# Altium PCB nrf52832_qfax_dcdc.PcbDoc
Units mm, origin at the board's own origin, x right, y up, seen from the top; angles counter-clockwise.
Board outline 43.26 x 33.96 mm, 2 copper layers (Top Layer, Bottom Layer), stack 1.671 mm thick; 36 components, 52 nets, 169 pads, 196 vias.
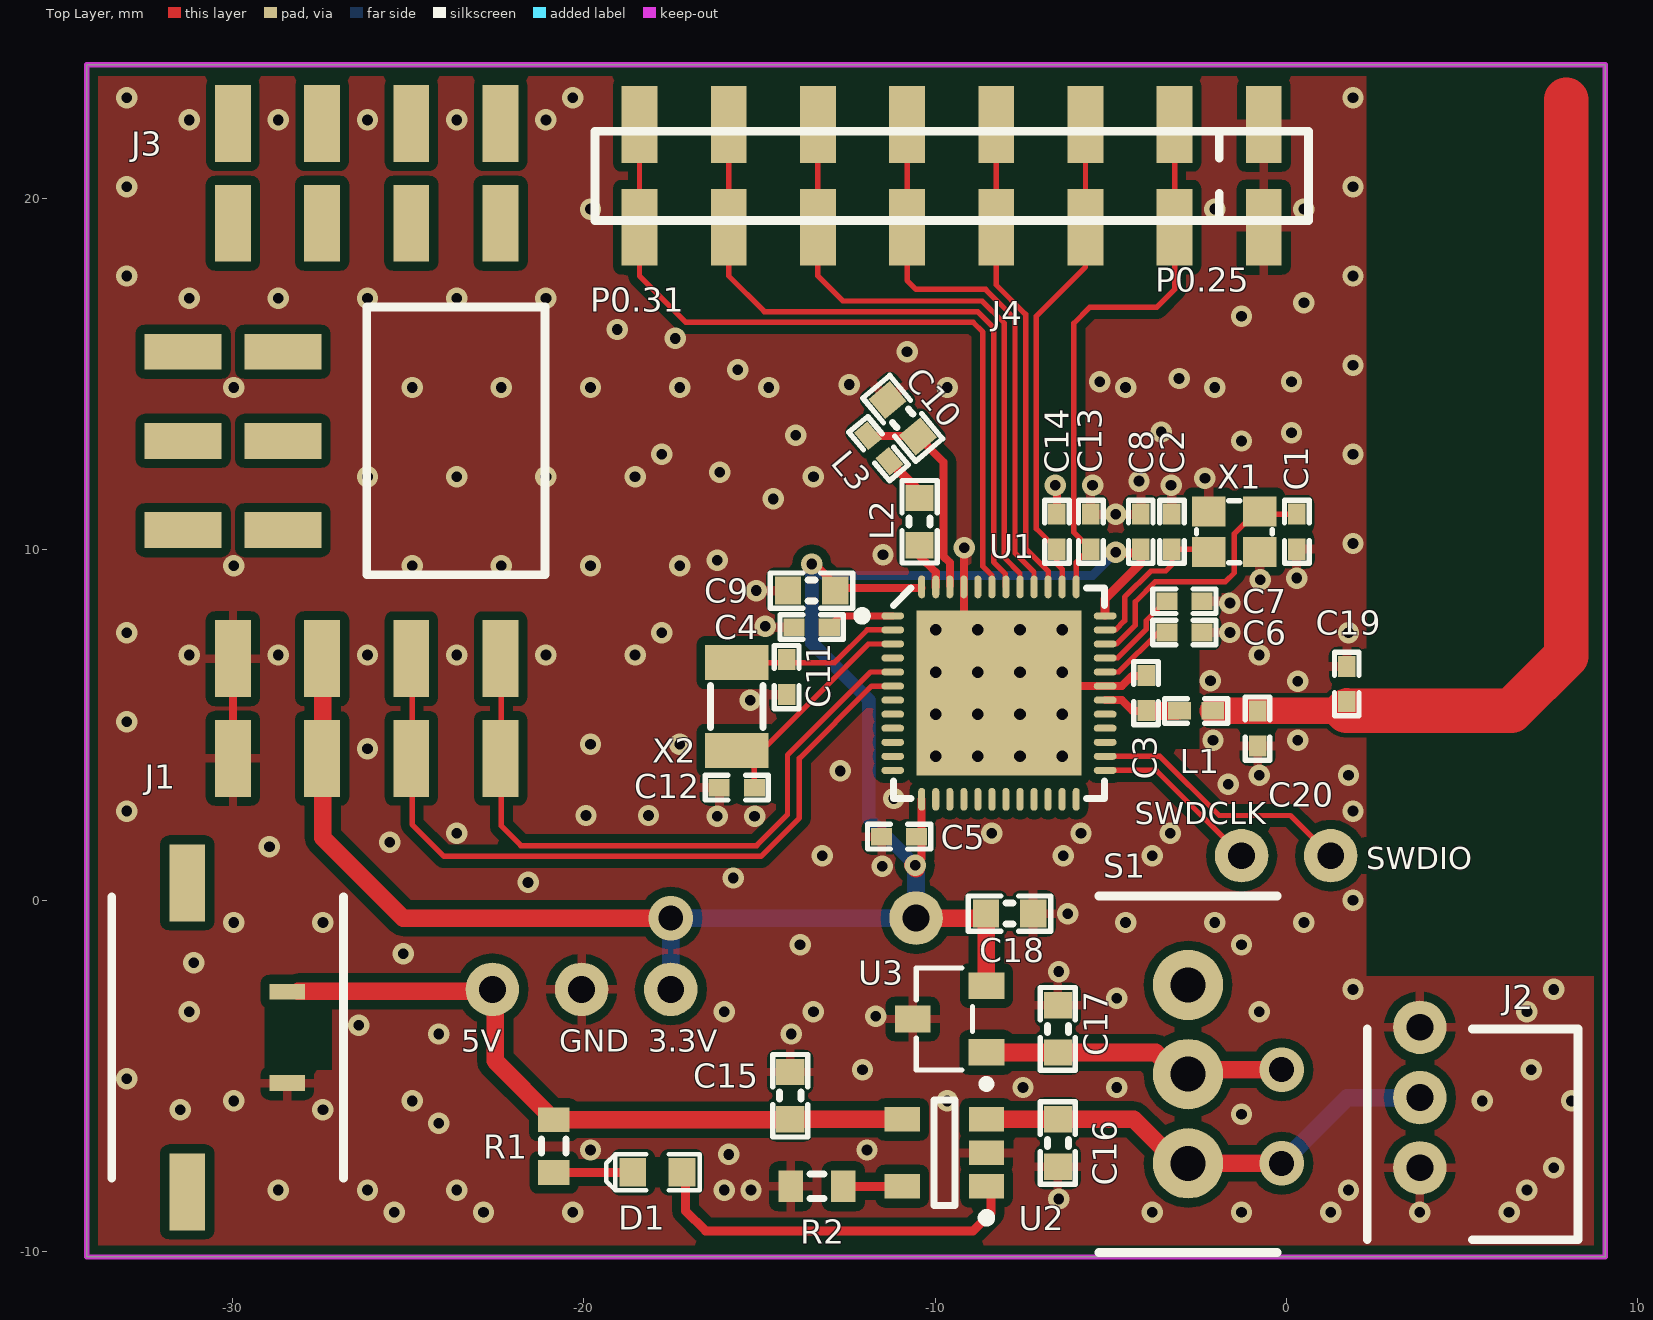
[diagram p0: Top Layer view]
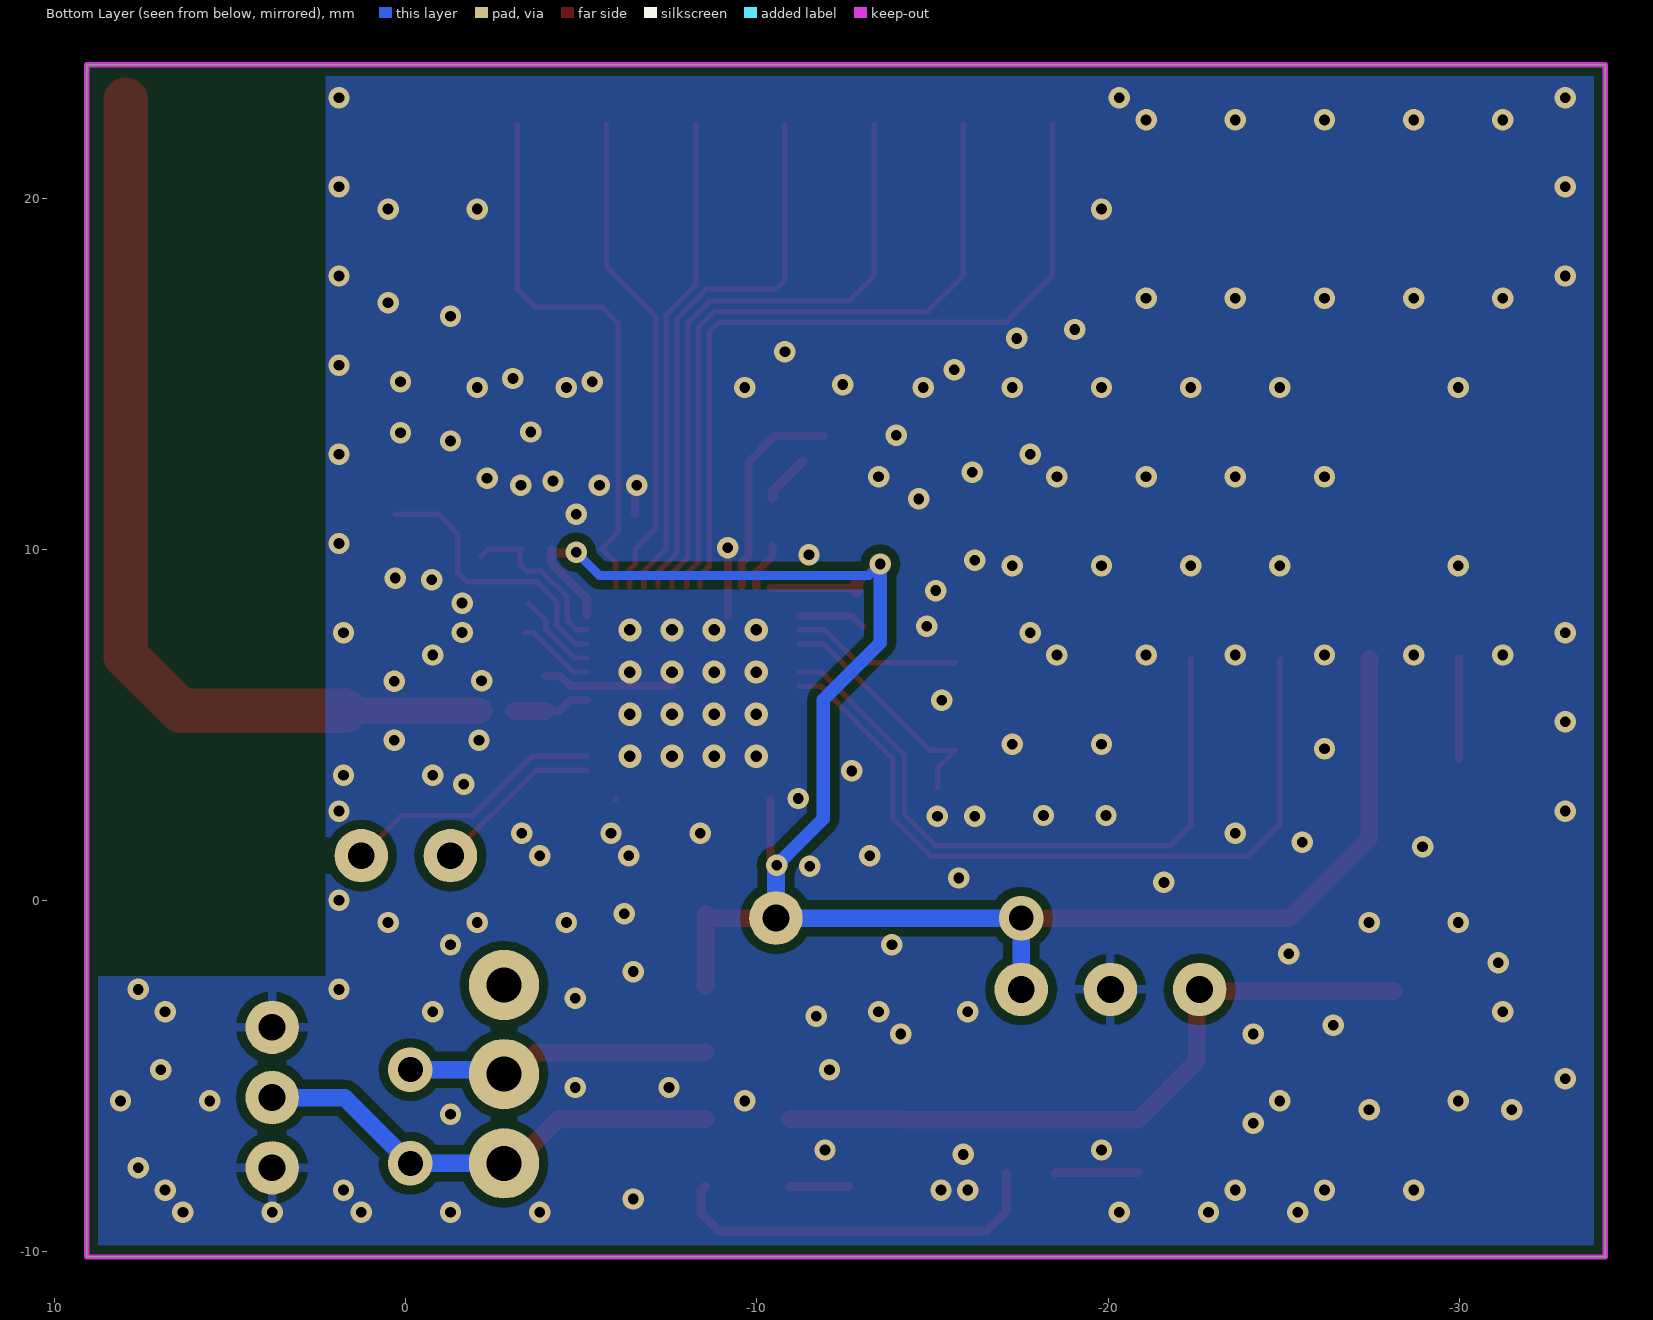
[diagram p1: Bottom Layer view, seen from below]
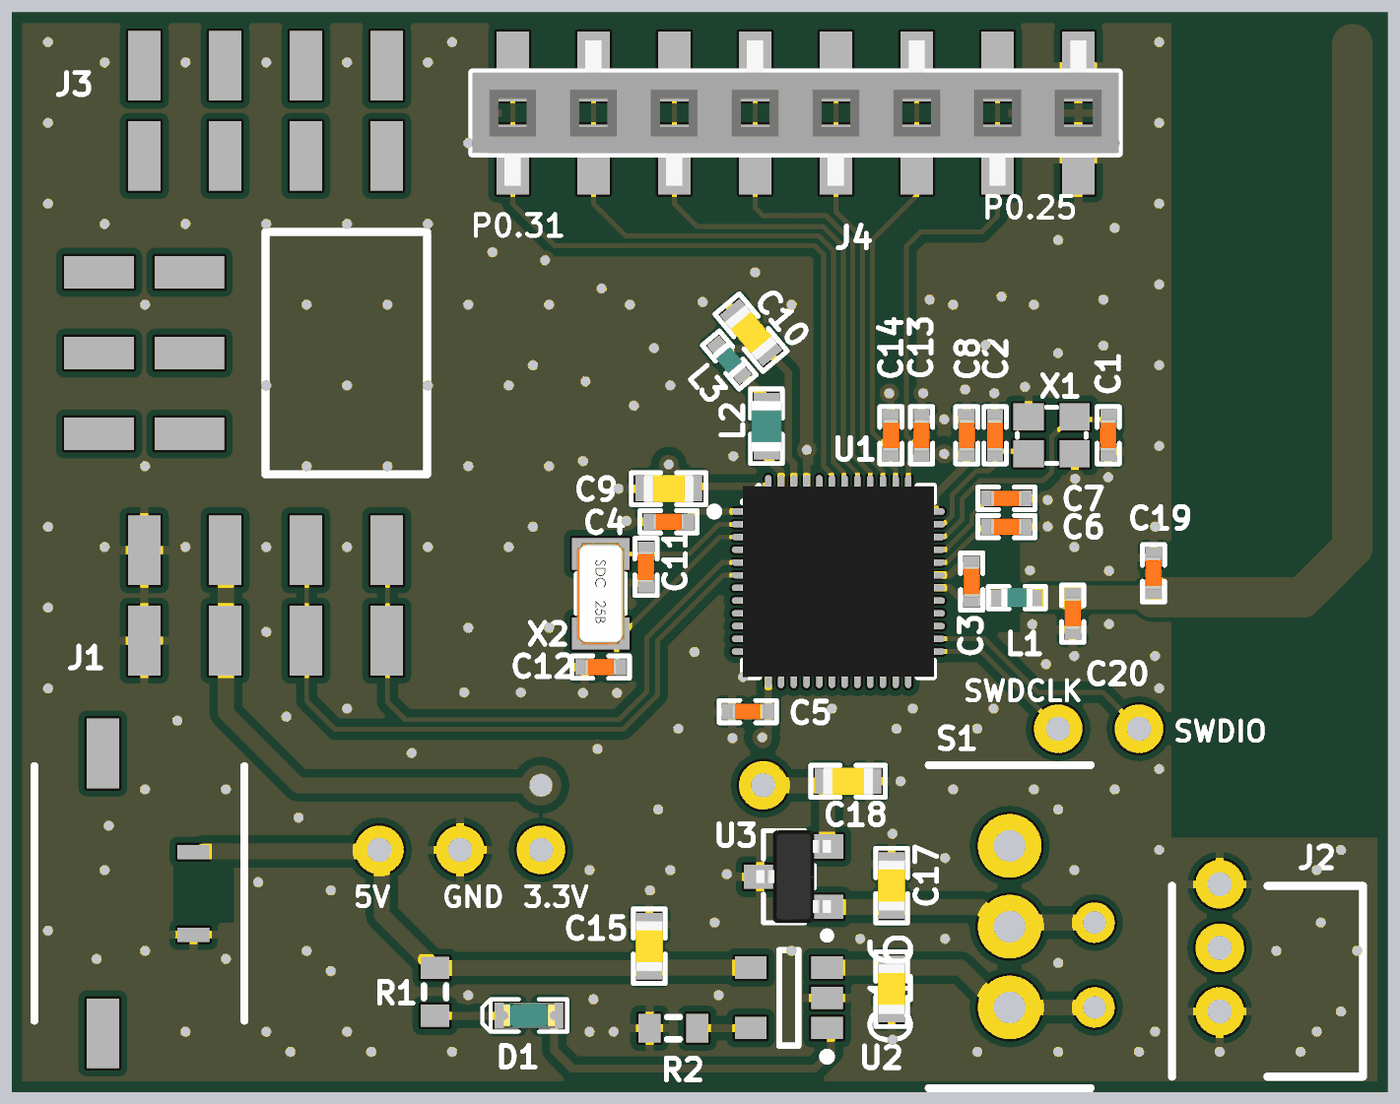
[diagram p2: 3D render of the assembled board from above, using the file's embedded part models]

## Layer stack, top to bottom
Top Solder: solder mask 0.0102, Solder Resist, Dk 3.5
Top Layer: signal copper 0.0356
Dielectric1: core 1.6002, FR-4, Dk 4.8
Bottom Layer: signal copper 0.0356
Bottom Solder: solder mask 0.0102, Solder Resist, Dk 3.5

## Board outline
-34.163,-10.16 -34.163,23.8 9.093,23.8 9.093,-10.16

## Design rules (kind name [scope] priority, off if disabled: settings)
Clearance Polygon_ANT [(InNamedPolygon('Top_Layer-GND')) or (InNamedPolygon('Bottom_Layer-GND')) vs InNet('RF')] p1: gap=0.127 ignorepadtopadclearanceinfootprint=FALSE except(0: Arc-Hole Track-Hole SMDPad-Hole THPad-Hole Via-Hole Fill-Hole Poly-Hole Region-Hole Text-Hole)
Clearance Polygon [(InNamedPolygon('Top_Layer-GND')) or (InNamedPolygon('Bottom_Layer-GND'))] p2: gap=0.254 ignorepadtopadclearanceinfootprint=FALSE except(0: Arc-Hole Track-Hole SMDPad-Hole THPad-Hole Via-Hole Fill-Hole Poly-Hole Region-Hole Text-Hole)
Clearance [All] p3: gap=0.152 ignorepadtopadclearanceinfootprint=FALSE except(0: Arc-Hole Track-Hole SMDPad-Hole THPad-Hole Via-Hole Fill-Hole Poly-Hole Region-Hole Text-Hole)
ComponentClearance [All] p1 off: gap=0.254 collisioncheckmode=3 verticalgap=0.254 showdistances=FALSE
FabricationTestPointUsage TestPointUsage [All] p1: valid=0 allowmultiple=FALSE
FabricationTestpoint Testpoint [All] p1: side=3 testpointundercomponent=TRUE minsize=1.016 maxsize=2.54 preferedsize=1.524 minholesize=0 maxholesize=1.016 preferedholesize=0.813 testpointgrid=0.025 allowsidetop=TRUE allowsidebottom=TRUE usegrid=TRUE gridtolerance=0
Height [All] p1 off: minheight=0 maxheight=25.4 prefheight=12.7
HoleSize [All] p1: absolutevalues=TRUE maxlimit=4.064 minlimit=0.305 maxpercent=80.000 minpercent=20.000
MinimumAnnularRing [All] p1 off: minimumring=0.152
PolygonConnect PolygonConnect_1 [isVia and innet(gnd)] p1: connectstyle=Direct reliefconductorwidth=0.254 reliefentries=4 polygonreliefangle="90 Angle" airgapwidth=0.254
PolygonConnect [All] p2: connectstyle=Relief reliefconductorwidth=0.254 reliefentries=4 polygonreliefangle="90 Angle" airgapwidth=0.254
RoutingVias [All] p1: holewidth=0.406 width=0.813 viastyle="Through Hole" minholewidth=0.254 minwidth=0.254 maxholewidth=0.711 maxwidth=1.27
SilkToSolderMaskClearance SilkscreenOverComponentPads [IsPad] p1: minsilkscreentomaskgap=0.254 clearancetoexposedcopper=TRUE
SolderMaskExpansion [All] p1: expansion=0.076
Width [All] p1: maxlimit=2.54 minlimit=0.15 preferedwidth=0.152
24 further rules are at their usual default settings.

## Classes and differential pairs
component class Header: C19 C20 J4
component class nrf52832_qfab_dcdc: C1 C2 C3 C4 C5 C6 C7 C8 C9 C10 C11 C12 C13 C14 L1 L2 L3 U1 X1 X2
component class Power_management: C15 C16 C17 C18 D1 J1 J2 J3 J? R1 R2 S1 U2 U3

## Components (designator, comment, footprint, x,y, rotation, side; value= is the part's Value field where it differs from the comment)
C1 "12pF" CAPC1005X04L 0.305,10.497 r270 top
C2 "12pF" CAPC1005X04L -3.251,10.497 r90 top
C3 "0.8pF" CAPC1005X04L -3.988,5.899 r270 top
C4 "100nF" CAPC1005X04L -13.513,7.779 r180 top
C5 "100nF" CAPC1005X04L -11.024,1.81 r180 top
C6 "N.C." CAPC1005X04L -2.896,7.626 r180 top
C7 "100pF" CAPC1005X04L -2.896,8.515 r0 top
C8 "100nF" CAPC1005X04L -4.14,10.497 r90 top
C9 "4.7µF" CAPC1608X06L -13.513,8.82 r180 top
C10 "1.0µF" CAPC1608X06L -10.921,13.728 r310 top
C11 "12pF" CAPC1005X04L -14.224,6.356 r270 top
C12 "12pF" CAPC1005X04L -15.646,3.207 r180 top
C13 "12pF" CAPC1005X04L -5.563,10.497 r90 top
C14 "12pF" CAPC1005X04L -6.528,10.497 r90 top
C15 "4.7µF" CAPC1608X06L -14.122,-5.567 r270 top
C16 "4.7µF" CAPC1608X06L -6.502,-6.917 r90 top
C17 "1µF" CAPC1608X06L -6.502,-3.662 r270 top
C18 "1µF" CAPC1608X06L -7.874,-0.381 r180 top
C19 "1.2pF" CAPC1005X04L 1.727,6.16 r90 top
C20 "12pF" CAPC1005X04L -0.813,4.89 r270 top
D1 "LED2" LED_0603_G -17.907,-7.747 r0 top
J1 "Micro_USB_B" Micro_USB_AB -28.448,-2.607 r270 top
J2 "Bat_con" Bat_con 3.81,-5.62 r270 top
J3 "Accel_shield_MPU9250" Accel_shield -29.995,10.541 r90 top
J4 "8pin_header" SOCKET_1x8_SMD -0.635,20.633 r180 top
L1 "3.9nH" INDC1005X04L -2.565,5.391 r0 top
L2 "10µH" INDC1608X06L -10.439,10.781 r270 top
L3 "15nH" INDC1005X04L -11.607,12.864 r310 top
R1 "Res3" J1-0603 -20.853,-7.004 r90 top value=330
R2 "Res3" J1-0603 -13.36,-8.147 r0 top value=10K
S1 "Switch" Switch -2.794,-7.493 r0 top
U1 "nRF52832-QFAB" QFN40P600X600X90-48N -8.179,5.899 r0 top locked
U2 "MCP73831" SOT23-5 -9.734,-7.192 r180 top
U3 "3.3V Regulator AP7333" SOT-23A -8.534,-4.332 r90 top value=AP7333-33SAG-7
X1 "32MHz" BT-XTAL_2016 -1.473,10.497 r180 top
X2 "32.768kHz" XTAL_3215 -15.646,5.518 r270 top

## Footprints (in the part's own frame and the unit in brackets; to place one, negate y for a bottom-side part, rotate by r counter-clockwise, add the part's x,y. Pads: shape width x height; smd on the part's side, far side on the other; paste and mask are expansions set on the pad)
Accel_shield [mm]
  rect 2.19x1.02 smd: 1(-6.5,-7.62) 1(-3.66,-7.62) 2(-6.5,-5.08) 2(-3.66,-5.08) 3(-6.5,-2.54) 3(-3.66,-2.54) 4(-6.5,0) 4(-3.66,0) 8(8.74,0) 8(11.58,0) 9(8.74,-2.54) 9(11.58,-2.54) 10(8.74,-5.08) 10(11.58,-5.08) 11(8.74,-7.62) 11(11.58,-7.62)
  rect 1.02x2.19 smd: 5(0,1.42) 5(0,-1.42) 6(2.54,-1.42) 6(2.54,1.42) 7(5.08,-1.42) 7(5.08,1.42)
  silkscreen extent -1.27,-8.89 6.35,-3.81
Bat_con [mil]
  round 60 hole 30: 1(0,0) 2(78.74,0)
  silkscreen extent -77,-59 159,177
BT-XTAL_2016 [mm] "Crystal 2.0 x 1.6 mm"
  rect 0.95x0.85 smd: 1(-0.725,-0.575) 2(0.725,-0.575) 3(0.725,0.575) 4(-0.725,0.575)
  silkscreen extent -1.08,-0.88 1.08,0.88
CAPC1005X04L [mm] "Chip Capacitor, 2-Leads, Body 1.0x0.5mm, IPC High Density"
  rect 0.6x0.5 smd: 1(-0.5,0) 2(0.5,0)
  silkscreen extent -0.9,-0.35 0.9,0.35, body extent -0.51,-0.25 0.51,0.25, height 0.5
CAPC1608X06L [mm] "Chip Capacitor, 2-Leads, Body 1.6x0.8mm, IPC High Density"
  rect 0.75x0.8 smd: 1(-0.675,0) 2(0.675,0)
  silkscreen extent -1.18,-0.5 1.17,0.5, body extent -0.8,-0.43 0.8,0.43, height 0.8
INDC1005X04L [mm] "Chip Inductor, 2-Leads, Body 1.0x0.5mm, IPC High Density"
  rect 0.65x0.5 smd: 1(-0.475,0) 2(0.475,0)
  silkscreen extent -0.9,-0.35 0.9,0.35, body extent -0.5,-0.3 0.5,0.3, height 0.5
INDC1608X06L [mm] "Chip Inductor, 2-Leads, Body 1.6x0.8mm, IPC High Density"
  rect 0.75x0.8 smd: 1(-0.675,0) 2(0.675,0)
  silkscreen extent -1.18,-0.5 1.17,0.5, body extent -0.8,-0.48 0.8,0.48, height 0.8
J1-0603 [mm] "Chip Resistor, Body 1.6x0.8mm, IPC High Density"
  rect 0.7x0.9 smd: 1(-0.75,0) 2(0.75,0)
  silkscreen extent -0.2,-0.35 0.2,0.35, body extent -0.85,-0.48 0.85,0.48, height 0.9
LED_0603_G [mil]
  rect 30x32 smd: 1(-27.5,0) 2(27.5,0)
  silkscreen extent -57,-20 48,20, body extent -32,-16 32,16, height 24
Micro_USB_AB [mm]
  rect 2.19x1.02 smd: 0(-3.1,-2.85) 0(5.7,-2.85)
  rect 0.45x1 smd: 1(0,0) 5(2.6,0)
  silkscreen extent -2.7,-5 5.3,1.6
QFN40P600X600X90-48N [mm] "QFN, 48-Leads, Body 6,0x6,0mm (max), Pitch 0,40mm, IPC Medium Density"
  oval 0.65x0.2 smd: 1(-3.025,2.2) 2(-3.025,1.8) 3(-3.025,1.4) 4(-3.025,1) 5(-3.025,0.6) 6(-3.025,0.2) 7(-3.025,-0.2) 8(-3.025,-0.6) 9(-3.025,-1) 10(-3.025,-1.4) 11(-3.025,-1.8) 12(-3.025,-2.2) 25(3.025,-2.2) 26(3.025,-1.8) 27(3.025,-1.4) 28(3.025,-1) 29(3.025,-0.6) 30(3.025,-0.2) 31(3.025,0.2) 32(3.025,0.6) 33(3.025,1) 34(3.025,1.4) 35(3.025,1.8) 36(3.025,2.2)
  oval 0.2x0.65 smd: 13(-2.2,-3.025) 14(-1.8,-3.025) 15(-1.4,-3.025) 16(-1,-3.025) 17(-0.6,-3.025) 18(-0.2,-3.025) 19(0.2,-3.025) 20(0.6,-3.025) 21(1,-3.025) 22(1.4,-3.025) 23(1.8,-3.025) 24(2.2,-3.025) 37(2.2,3.025) 38(1.8,3.025) 39(1.4,3.025) 40(1,3.025) 41(0.6,3.025) 42(0.2,3.025) 43(-0.2,3.025) 44(-0.6,3.025) 45(-1,3.025) 46(-1.4,3.025) 47(-1.8,3.025) 48(-2.2,3.025)
  rect 4.7x4.7 smd: 49(0,0)
  silkscreen extent -4.02,-3 3,3, body extent -3.02,-3.02 3.02,3.02, height 0.86
SOCKET_1x8_SMD [mm]
  rect 1.02x2.19 smd: 1(0,1.465) 1(0,-1.465) 2(2.54,-1.465) 2(2.54,1.465) 3(5.08,-1.465) 3(5.08,1.465) 4(7.62,-1.465) 4(7.62,1.465) 5(10.16,-1.465) 5(10.16,1.465) 6(12.7,1.465) 6(12.7,-1.465) 7(15.24,-1.465) 7(15.24,1.465) 8(17.78,-1.465) 8(17.78,1.465)
  silkscreen extent -1.27,-1.27 19.05,1.27, body extent -1.27,-2.29 19.05,2.29, height 7.47
SOT23-5 [mm] "SOT23, 5-Leads, Body 2,90x2,45mm, Pitch 0,95mm, IPC Medium Density"
  rect 1x0.7 smd: 1(-1.2,0.95) 2(-1.2,0) 3(-1.2,-0.95) 4(1.2,-0.95) 5(1.2,0.95)
  silkscreen extent -1.33,-1.5 0.3,1.97, body extent -0.7,-1.5 0.7,1.5, height 1.1
SOT-23A [mil]
  rect 30x40 smd: 1(0,0) 2(74.8,0) 3(37.4,82.68)
  silkscreen extent -39,-4 94,79, body extent -20,-5 95,87, height 39
Switch [mm]
  round 2 hole 1: 1(0,0) 2(0,2.54) 3(0,5.08)
  silkscreen extent -2.54,-2.54 2.54,7.62
XTAL_3215 [mm] "XTAL SMD 3.2 x 1.5 mm"
  rect 1x1.8 smd: 1(-1.25,0) 2(1.25,0)
  silkscreen extent -0.6,-0.75 0.6,0.75, body extent -1.6,-0.75 1.6,0.75, height 0.81

## Part data
C1 C2 C11 C12 C13 C14: library part C0402-12p, "Capacitor, NP0, ±2%", Artikkelnr Noca=20029159, Artikkelnr Simpro=N.A., Footprint Doc=0402, LatestRevisionDate=2011-05-11, Note=50V, Part Number=C0402-12p, Pin Count=2, Published=2009-05-08, Publisher="Nordic Semiconductor"
C3: library part C0402-0.8p, "Capacitor, NP0, ±5%", Artikkelnr Noca=20029147, Artikkelnr Simpro=N.A., Footprint Doc=0402, LatestRevisionDate=2012-11-21, Note=50V, Part Number=C0402-0.8p, Pin Count=2, Published=2009-05-08, Publisher="Nordic Semiconductor"
C4 C5 C8: library part C0402-100n, "Capacitor, X7R, ±10%", Artikkelnr Noca=20039200, Artikkelnr Simpro=N.A., Footprint Doc=0402, LatestRevisionDate=2009-11-23, Note=16V, Part Number=C0402-100n, Pin Count=2, Published=2009-05-08, Publisher="Nordic Semiconductor"
C6: library part C0402-N.C., "Not mounted", Artikkelnr Noca=N.A., Artikkelnr Simpro=N.A., Footprint Doc=0402, LatestRevisionDate=2009-05-08, Note="Chip Cap", Part Number=C0402-N.C., Pin Count=2, Published=2009-05-08, Publisher="Nordic Semiconductor"
C7: library part C0402-100p, "Capacitor, NP0, ±5%", Artikkelnr Noca=20029135, Artikkelnr Simpro=N.A., Footprint Doc=0402, LatestRevisionDate=2009-05-08, Note=50V, Part Number=C0402-100p, Pin Count=2, Published=2009-05-08, Publisher="Nordic Semiconductor"
C9: library part C0603-4µ7, "Capacitor, X5R, ±10%", Artikkelnr Noca=20069060, Artikkelnr Simpro=N.A., Footprint Doc=0603, LatestRevisionDate=2009-11-23, Note=6.3V, Part Number=C0603-4µ7, Pin Count=2, Published=2009-05-08, Publisher="Nordic Semiconductor"
C10: library part C0603-1µ0, "Capacitor, X7R, ±10%", Artikkelnr Noca=20039335, Artikkelnr Simpro=N.A., Footprint Doc=0603, LatestRevisionDate=2013-06-05, Note=16V, Part Number=C0603-1µ0, Pin Count=2, Published=2009-05-08, Publisher="Nordic Semiconductor"
C15 C16 C17 C18: "Capacitor, X5R, ±10%", Part Number=C0603-4µ7, Artikkelnr Noca=20069060, Artikkelnr Simpro=N.A., Footprint Doc=0603, LatestRevisionDate=2009-11-23, Note=6.3V, Pin Count=2, Published=2009-05-08, Publisher="Nordic Semiconductor"
C19 C20: "Capacitor, NP0, ±2%", Part Number=C0402-12p, Artikkelnr Noca=20029159, Artikkelnr Simpro=N.A., Footprint Doc=0402, LatestRevisionDate=2011-05-11, Note=50V, Pin Count=2, Published=2009-05-08, Publisher="Nordic Semiconductor"
D1: "Typical RED, GREEN, YELLOW, AMBER GaAs LED", LatestRevisionDate=17-Jul-2002, LatestRevisionNote="Re-released for DXP Platform.", PackageDescription="SM LED; 2 Flat Leads", PackageReference=3.2X1.6X1.1, PackageVersion=Feb-2002, Published=8-Jun-2000, Publisher="Altium Limited"
J4: Supplier Part Number 1=2698925, Supplier 1=Arrow, Supplier 2=Arrow, Supplier 3=Digi-Key, Supplier Part Number 2=2698940, Supplier Part Number 3=SAM1198-08-ND
L1: library part L0402-3n9, "High frequency chip inductor ±5%", Manufacturer=Murata, Manufacturer Part Number=LQP15MN3N9B02D, Supplier part number=490-1131-1-ND, Artikkelnr Noca=33029151, Artikkelnr Simpro=N.A., Datasheet=http://search.murata.co.jp/Ceramy/image/img/PDF/ENG/L0075S0084LQP15M.pdf, Footprint Doc=0402, LatestRevisionDate=2012-09-19, Note="High frequency chip inductor ±5%", Part Number=L0402-3n9, Pin Count=2, Published=2009-05-08, Publisher="Nordic Semiconductor", Supplier=Digi-Key
L2: library part L0603-10µ, "Chip inductor, IDC,min = 50 mA, ±20%", 2nd source part number=178-6105, Manufacturer="Taiyo Yuden", Manufacturer Part Number=LBMF1608T100K, Supplier part number=587-1714-1-ND, 2nd source Supplier=Farnell, Artikkelnr Noca=33029314, Artikkelnr Simpro=N.A., Datasheet=http://www.yuden.co.jp/ut/product/pdf/elb2_e.pdf, Footprint Doc=0603, LatestRevisionDate=2012-09-19, Note="LBMF1608T100K 10µH 80mA 0603", Part Number=L0603-10µ, Pin Count=2, Published=2010-02-24, Publisher="Nordic Semiconductor", Supplier=Digi-Key
L3: library part L0402-15n, "High frequency chip inductor ±10%", 2nd source part number=658-1328, Manufacturer="Taiyo Yuden", Manufacturer Part Number=HK100515NJ-T, Supplier part number=587-1521-1-ND, 2nd source Supplier=Farnell, Artikkelnr Noca=33029323, Artikkelnr Simpro=N.A., Datasheet=http://www.yuden.co.jp/productdata/catalog/en/mlci04_e.pdf, Footprint Doc=0402, LatestRevisionDate=2012-09-19, Note="High frequency chip inductor ±10%", Part Number=L0402-15n, Pin Count=2, Published=2010-07-12, Publisher="Nordic Semiconductor", Supplier=Digi-Key
R1 R2: "Resistor", LatestRevisionDate=29-May-2009, LatestRevisionNote="IPC-7351 Footprint Added.", PackageDescription="Chip Resistor", PackageReference=J1-0603, Published=8-Jun-2000, Publisher="Altium Limited"
U1: "Multi-protocol Bluetooth Low Energy, ANT and 2.4GHz proprietary system-on-chip", Manufacturer="Nordic Semiconductor", Artikkelnr Noca=N.A., Artikkelnr Simpro=N.A., Footprint Doc=QFN-48, LatestRevisionDate=2016-11-24, Manufacturer Part Number=nRF52832-QFAB, Part Number=nRF52832-QFAB, Pin Count=48, Published=2016-11-24, Publisher="Nordic Semiconductor", Supplier="Nordic Semiconductor"
U3: "300mA, Low Quiescent Current, Fast Transient Low Dropout Linear Regulator", Manufacturer="Diodes Incorporated", Manufacturer Part Number=AP7333-33SAG-7, Supplier part number=AP7333-33SAG-7DICT-ND, Artikkelnr Noca=17039216, Artikkelnr Simpro=N.A., Datasheet=http://www.diodes.com/datasheets/AP7333.pdf, Footprint Doc=SOT-23-3, LatestRevisionDate=2012-06-15, Part Number=AP7333-33SAG-7, Pin Count=3, Published=2012-06-15, Publisher="Nordic Semiconductor", Supplier=Digi-Key
X1: library part XTAL_SMD2016_32MHz_8pF_General, "XTAL SMD 2016, 32MHz, Cl=8pF, Total Tol: ±40ppm", Artikkelnr Noca=N.A., Artikkelnr Simpro=N.A., Footprint Doc=XTAL_2016, LatestRevisionDate=2016-08-19, Note="XTAL SMD 32.000MHz", Part Number=XTAL_SMD2016_32MHz_8pF_General, Pin Count=4, Published=2016-08-19, Publisher="Nordic Semiconductor"
X2: library part XTAL_SMD3215_32.768kHz_9pF_General, "XTAL SMD 3215, 32.768kHz, Cl=9pF, Total Tol: ±50ppm", Artikkelnr Noca=N.A., Artikkelnr Simpro=N.A., Footprint Doc=XTAL_3215, LatestRevisionDate=2016-08-19, Note="XTAL SMD 32.768kHz", Part Number=XTAL_SMD3215_32.768kHz_9pF_General, Pin Count=2, Published=2016-08-19, Publisher="Nordic Semiconductor"

## Free pads (board coordinates)
  round 1.524 hole 0.762: 20(-10.541,-0.508) 34(1.27,1.27) 35(-1.27,1.27) 37(3.81,-3.62) 40(-17.526,-2.54) 41(-20.066,-2.54) 42(-22.606,-2.54)

## Via types
v1: diameter 0.61, hole 0.305, Top Layer to Bottom Layer, tented both sides, 177 vias
v2: diameter 0.66, hole 0.33, Top Layer to Bottom Layer, tented both sides, 16 vias
v3: diameter 1.27, hole 0.711, Top Layer to Bottom Layer, 2 vias
v4: diameter 1.27, hole 0.711, Top Layer to Bottom Layer, tented both sides, 1 vias

## Nets (pads, with @x,y where several pads share a name; then routed paths per layer and width w, separated by ;. In a path a pad name is that pad's centre, name@x,y a point inside that pad or via, vN(x,y) a via of type N, cw(c..) or ccw(c..) an arc to the next point about the centre after c; other vN are vias at no path point)
"3.7V a": C16.2 J2.1 S1.1 U2.3 | length 16.8
  Top Layer w0.5: U2.3 C16.2 -4.343,-6.242 -3.092,-7.493 S1.1 v3(-0.127,-7.493)
  Bottom Layer w0.5: S1.1@-3.2,-7.385 -3.092,-7.493 S1.1 v3(-0.127,-7.493) 1.746,-5.62 J2.1
"3.7V b": C17.2 S1.2 U3.1 | length 11.7
  Top Layer w0.5: U3.1 -8.529,-4.337 C17.2 -3.708,-4.337 -3.2,-4.845 -3.181,-4.826 v3(-0.127,-4.826)
  Bottom Layer w0.5: S1.2@-3.2,-4.845 -3.181,-4.826 v3(-0.127,-4.826)
5V+: C15.2 J1.1 pad.42 R1.2 U2.4 | length 19.8
  Top Layer w0.254: C15.2@-14.134,-6.254 C15.2
  Top Layer w0.5: J1.1@-28.141,-2.591 -22.657,-2.591 -22.53,-2.718 -22.53,-4.577 R1.2 C15.2@-14.134,-6.254 ; C15.2 U2.4
DEC1: C4.1 U1.1 | length 1.9
  Top Layer w0.203: C4.1@-13.009,7.798 -12.708,8.099 U1.1
DEC2: C6.2 U1.32 | length 2.2
  Top Layer w0.152: U1.32 -4.768,6.499 -3.641,7.626 C6.2 C6.2@-3.378,7.626
DEC3: C7.1 U1.33 | length 2.4
  Top Layer w0.152: U1.33 -4.799,6.899 -3.988,7.71 -3.988,7.961 C7.1@-3.504,8.446
DEC4: C10.2 L3.1 U1.46 | length 6
  Top Layer w0.229: L3.1 C10.2@-10.505,13.228 ; C10.2 -9.754,12.477 -9.754,9.791 -9.579,9.616 U1.46@-9.579,8.955
GND: C1.2 C2.2 C3.1 C4.2 C5.2 C6.1 C7.2 C8.2 C9.2 C10.1 C11.2 C12.2 C13.2 C14.2 C15.1 C16.1 C17.1 C18.1 C19.2 C20.2 J1.5 J2.2 J3.4 J4.1 pad.37 pad.41 R2.1 U1.31 U1.45 U1.49 U2.2 U3.3 X1.2 X1.4 | length 9.3
  Top Layer w0.229: J3.4@-29.995,4.041 J3.4@-29.995,6.881 ; U1.49@-9.179,8.099 U1.45 v1@-9.179,10.04 ; U1.49@-7.561,6.102 -4.68,6.102 -4.393,6.389 C3.1@-3.98,6.389 ; v1(-6.579,11.818) -6.528,11.767 C14.2
  other v1: -25.4,-8.89 -22.86,-8.89 -20.32,-8.89 -3.81,-8.89 -1.27,-8.89 1.27,-8.89 3.81,-8.89 6.35,-8.89 -6.477,-8.509 -28.702,-8.255 -26.162,-8.255 -23.622,-8.255 -16.002,-8.255 -15.24,-8.255 1.778,-8.255 6.858,-8.255 7.62,-7.62 -15.875,-7.239 -19.812,-7.112 -11.938,-7.112 -24.13,-6.35 -1.27,-6.096 -31.496,-5.969 -27.432,-5.969 -29.972,-5.715 -24.892,-5.715 -9.652,-5.715 5.588,-5.715 8.128,-5.715 -7.493,-5.334 -4.826,-5.334 -33.02,-5.08 -12.065,-4.826 6.985,-4.826 -24.13,-3.81 -14.097,-3.81 -26.416,-3.556 -11.684,-3.302 -31.242,-3.175 -16.002,-3.175 -13.462,-3.175 -0.762,-3.175 6.858,-3.175 -4.826,-2.794 1.905,-2.54 7.62,-2.54 -6.477,-2.032 -31.115,-1.778 -25.146,-1.524 -13.843,-1.27 -1.27,-1.27 -29.972,-0.635 -27.432,-0.635 -4.572,-0.635 -2.032,-0.635 0.508,-0.635 -6.223,-0.381 1.905,0 -21.59,0.508 -15.748,0.635 -11.506,0.972 -13.208,1.27 -6.35,1.27 -3.81,1.27 -28.956,1.524 -25.527,1.651 -23.622,1.905 -8.382,1.905 -5.842,1.905 -3.302,1.905 -16.205,2.394 -15.138,2.394 -19.939,2.413 -18.161,2.413 -33.02,2.54 1.905,2.54 -11.176,2.899 -1.651,3.302 -0.762,3.556 1.778,3.556 -12.7,3.683 -26.162,4.318 -19.812,4.445 -17.272,4.445 -2.083,4.553 0.33,4.559 -33.02,5.08 -15.265,5.696 0.33,6.236 -2.155,6.249 -31.242,6.985 -28.702,6.985 -26.162,6.985 -23.622,6.985 -21.082,6.985 -18.542,6.985 -0.762,6.985 -33.02,7.62 -17.78,7.62 -1.6,7.626 1.778,7.62 -14.834,7.804 -1.6,8.465 -15.088,8.82 -0.737,9.13 0.305,9.176 -29.972,9.525 -24.892,9.525 -22.352,9.525 -19.812,9.525 -17.272,9.525 -16.205,9.684 -11.481,9.841 -9.17,10.04 1.905,10.16 -4.852,10.997 -14.605,11.43 -5.512,11.818 -3.277,11.818 -4.191,11.938 -2.312,12.021 -26.162,12.065 -23.622,12.065 -21.082,12.065 -18.542,12.065 -13.462,12.065 -16.129,12.192 -17.78,12.7 1.905,12.7 -1.27,13.081 -13.97,13.24 0.152,13.316 -3.556,13.335 -29.972,14.605 -24.892,14.605 -22.352,14.605 -19.812,14.605 -17.272,14.605 -14.732,14.605 -9.652,14.605 -4.572,14.605 -2.032,14.605 -12.446,14.688 -5.309,14.764 0.152,14.764 -3.048,14.859 -15.621,15.113 1.905,15.24 -10.795,15.621 -17.399,16.002 -19.05,16.256 -1.27,16.637 0.508,17.018 -31.242,17.145 -28.702,17.145 -26.162,17.145 -23.622,17.145 -21.082,17.145 -33.02,17.78 1.905,17.78 -19.812,19.685 -2.032,19.685 0.508,19.685 -33.02,20.32 1.905,20.32 -31.242,22.225 -28.702,22.225 -26.162,22.225 -23.622,22.225 -21.082,22.225 -33.02,22.86 -20.32,22.86 1.905,22.86
  other v2: -9.979,4.099 -8.779,4.099 -7.579,4.099 -6.379,4.099 -9.979,5.299 -8.779,5.299 -7.579,5.299 -6.379,5.299 -9.979,6.499 -8.779,6.499 -7.579,6.499 -6.379,6.499 -9.979,7.699 -8.779,7.699 -7.579,7.699 -6.379,7.699
NetC3_2: C3.2 L1.1 U1.30 | length 2.2
  Top Layer w0.229: U1.30 -4.679,5.699 -4.369,5.389 C3.2@-3.98,5.389
  Top Layer w0.508: C3.2@-3.988,5.394 L1.1@-3.091,5.394
NetL2_1: L2.1 L3.2 | length 1.4
  Top Layer w0.279: L3.2 -10.439,11.638 L2.1
NetL2_2: L2.2 U1.47 | length 1.4
  Top Layer w0.229: L2.2 -10.439,9.805 -9.979,9.344 U1.47
P0.00/XL1: C11.1 U1.2 X2.1 | length 4.8
  Top Layer w0.152: X2.1 -12.862,6.768 -11.931,7.699 U1.2
P0.01/XL2: C12.1 U1.3 X2.2 | length 7
  Top Layer w0.152: C12.1 -15.146,3.768 X2.2 -14.931,4.268 -11.9,7.299 U1.3
P0.02/AIN0: U1.4
P0.03/AIN1: J3.1 U1.5 | length 19.2
  Top Layer w0.152: J3.1@-22.375,6.881 -22.352,6.858 -22.352,2.115 -21.794,1.556 -15.081,1.556 -14.199,2.438 -14.199,4.136 -11.836,6.499 U1.5
P0.04/AIN2: J3.2 U1.6 | length 21.8
  Top Layer w0.152: J3.2@-24.915,6.881 -24.892,6.858 -24.892,2.159 -23.985,1.252 -14.954,1.252 -13.864,2.342 -13.864,4.041 -11.806,6.099 -11.804,6.099 U1.6
P0.05/AIN3: U1.7
P0.06: U1.8
P0.07: U1.9
P0.08: U1.10
P0.09: U1.11
P0.10: U1.12
P0.11: U1.14
P0.12: U1.15
P0.13: U1.16
P0.14: U1.17
P0.15: U1.18
P0.16: U1.19
P0.17: U1.20
P0.18: U1.21
P0.19: U1.22
P0.20: U1.23
P0.21: U1.24 | length 0
  Top Layer w0.152: U1.24 U1.24@-5.969,2.864
P0.22: U1.27
P0.23: U1.28
P0.24: U1.29
P0.25: C13.1 J4.2 U1.37 | length 15.9
  Top Layer w0.152: U1.37 -5.979,9.624 C13.1@-5.584,10.018 ; C13.1 C13.1@-5.584,10.018 ; J4.2@-3.175,22.098 -3.175,19.168 -3.175,17.399 -3.683,16.891 -5.588,16.891 -6.045,16.434 -6.045,14.783 -6.045,10.479 C13.1@-5.584,10.018
P0.26: C14.1 J4.3 U1.38 | length 14.1
  Top Layer w0.152: U1.38 -6.379,9.433 -6.528,9.582 C14.1 -7.112,10.581 -7.112,14.119 -7.112,16.637 -5.715,18.034 -5.715,19.168 J4.3@-5.715,22.098
P0.27: J4.4 U1.39 | length 13.8
  Top Layer w0.152: J4.4@-8.255,22.098 -8.255,19.168 -8.255,17.526 -7.417,16.688 -7.417,10.012 -6.779,9.374 U1.39
P0.28/AIN4: J4.5 U1.40 | length 15.8
  Top Layer w0.152: J4.5@-10.795,22.098 -10.795,17.653 -10.542,17.4 -8.559,17.4 -7.722,16.562 -7.722,9.886 -7.179,9.343 U1.40
P0.29/AIN5: J4.6 U1.41 | length 17.9
  Top Layer w0.152: J4.6@-13.335,22.098 -13.335,17.78 -12.623,17.068 -8.658,17.068 -8.027,16.437 -8.027,9.76 -7.579,9.312 U1.41
P0.30/AIN6: J4.7 U1.42 | length 20
  Top Layer w0.152: J4.7@-15.875,22.098 -15.875,17.78 -14.859,16.764 -8.784,16.764 -8.331,16.311 -8.331,9.634 -8.001,9.303 -8.001,8.946 U1.42
P0.31/AIN7: J4.8 U1.43 | length 22.1
  Top Layer w0.152: J4.8@-18.415,22.098 -18.415,17.78 -17.095,16.46 -8.911,16.46 -8.636,16.185 -8.636,9.507 -8.379,9.25 U1.43
Prog: R2.2 U2.5 | length 1.7
  Top Layer w0.254: R2.2 -10.939,-8.147 U2.5
RF: C19.1 C20.1 L1.2 | length 26.7
  Top Layer w0.762: L1.2@-2.082,5.398 1.465,5.398 C19.1
  Top Layer w1.27: C19.1@1.727,5.398 6.416,5.398 7.975,6.957 ; 7.979,6.957 7.979,22.798
Stat_1: D1.1 R1.1 | length 2.4
  Top Layer w0.254: R1.1 -18.516,-7.754 D1.1@-18.504,-7.766
Stat_2: D1.2 U2.1 | length 11
  Top Layer w0.254: D1.2@-17.107,-7.766 -17.107,-8.845 -16.535,-9.417 -8.915,-9.417 -8.407,-8.909 -8.407,-8.269 U2.1
SWDCLK: pad.35 U1.25 | length 4.9
  Top Layer w0.152: U1.25 -3.699,3.699 pad.35
SWDIO: pad.34 U1.26 | length 7.6
  Top Layer w0.152: U1.26 -3.591,4.099 -1.905,2.413 0.127,2.413 pad.34
VDD_NRF: C5.1 C8.1 C9.1 C18.2 J3.3 pad.20 pad.40 U1.13 U1.36 U1.48 U3.2 | length 58.2
  Top Layer w0.229: v1(-13.509,9.576) -13.426,9.576 -12.834,8.984 -12.749,8.899 U1.48@-10.389,8.899 ; v1(-10.566,0.997) -10.379,1.185 U1.13
  Top Layer w0.254: U1.36@-5.156,8.127 -5.156,8.587 -4.14,9.603 C8.1@-4.14,9.895 ; v1(-4.852,9.913) -4.834,9.895 C8.1@-4.14,9.895 ; C8.1 C8.1@-4.14,9.895
  Top Layer w0.381: C9.1@-12.834,8.814 C9.1@-12.834,8.984 ; v1@-10.64,0.997 v1(-10.566,0.997)
  Top Layer w0.5: J3.3@-27.455,6.881 -27.432,6.858 -27.432,1.778 -25.146,-0.508 v4(-17.526,-0.508) ; v1@-10.64,0.997 v1@-10.541,0.898 ; pad.20 -8.676,-0.508 C18.2 -8.534,-0.396 U3.2 U3.2@-8.509,-2.407
  Bottom Layer w0.254: v1(-13.509,9.576) -13.185,9.252 -5.512,9.252 v1(-4.852,9.913)
  Bottom Layer w0.381: v1(-13.509,9.576) -13.509,7.338 -11.886,5.715 -11.886,2.317 v1(-10.566,0.997)
  Bottom Layer w0.5: pad.40 -17.526,-0.561 -17.473,-0.508 pad.20 -10.541,0.972 v1(-10.566,0.997)
XC1: C1.1 U1.34 X1.1 | length 8
  Top Layer w0.152: U1.34 -4.83,7.299 -4.295,7.834 -4.295,8.502 -3.723,9.074 -1.727,9.074 -1.473,9.328 -1.473,10.446 -0.923,10.997 C1.1
XC2: C2.1 U1.35 X1.3 | length 4.7
  Top Layer w0.152: U1.35 -4.864,7.699 -4.6,7.963 -4.6,8.632 -3.853,9.379 -3.429,9.379 -3.252,9.557 C2.1@-3.252,9.989 ; C2.1@-3.302,9.997 C2.1 -2.346,9.997 X1.3@-2.146,9.797
pads on no net: J1.0 J3.5 J3.6 J3.7 J3.8 J3.9 J3.10 J3.11 S1.3 U1.44

## Polygon pours and split planes (outlines as drawn)
GND on Bottom Layer "Bottom_Layer-GND" (solid, remove dead copper, pour order 6): -34.163,-10.16 -34.163,23.8 9.093,23.8 9.093,-10.084 9.017,-10.16
GND on Top Layer "Top_Layer-GND" (solid, remove dead copper, pour order 8): -34.036,-10.16 -34.036,23.622 -34.163,23.749 9.093,23.749 9.093,-10.16

## Keep-outs
Keep-Out Layer:
  the board outline again, w0.152

## Other copper
Top Layer:
  pour cut-out: -6.223,12.319 -6.223,16.51 -5.588,17.145 -3.81,17.145 -3.429,17.526 -3.429,17.907 -3.683,17.907 -3.81,18.034 -3.81,20.32 -3.683,20.32 -3.429,20.574 -3.429,20.955 -3.683,20.955 -3.81,21.082 -3.81,23.622 -5.08,23.622 -5.08,20.955 -5.334,20.955 -5.461,20.828 -5.461,20.447 -5.334,20.447 -5.08,20.193 -5.08,18.034 -5.461,18.034 -6.858,16.637 -6.858,12.319
  pour cut-out: -29.083,-2.921 -27.178,-2.921 -27.178,-4.826 -29.083,-4.826
  pour cut-out: -14.351,2.794 -14.351,4.191 -11.938,6.604 -11.684,6.604 -11.684,7.112 -11.938,7.112 -14.605,4.445 -14.605,2.794
  pour cut-out: -2.464,4.299 -5.207,4.299 -5.207,7.195 -2.464,7.195
Multi-Layer:
  pour cut-out: 2.286,-2.159 2.286,26.67 10.033,26.67 10.033,-2.159

## Silkscreen, mask and mechanical layers (free items; w line width, h text height)
Top Overlay:
  text "P0.25" at -3.734,17.336 h0.69
  text "P0.31" at -19.812,16.764 h0.69
  text "SWDCLK" at -4.318,2.159 h0.63
  text "SWDIO" at 2.286,0.889 h0.63
  text "5V" at -23.495,-4.318 h0.63
  text "GND" at -20.701,-4.318 h0.63
  text "3.3V" at -18.161,-4.318 h0.63
Mechanical 1:
  the board outline again, w0.152